# Altium PCB Power Supply.PcbDoc
Units mm, origin at the board's own origin, x right, y up, seen from the top; angles counter-clockwise.
Board outline 75 x 40 mm, 2 copper layers (Top Layer, Bottom Layer), stack 1.671 mm thick; 30 components, 19 nets, 79 pads, 7 vias.
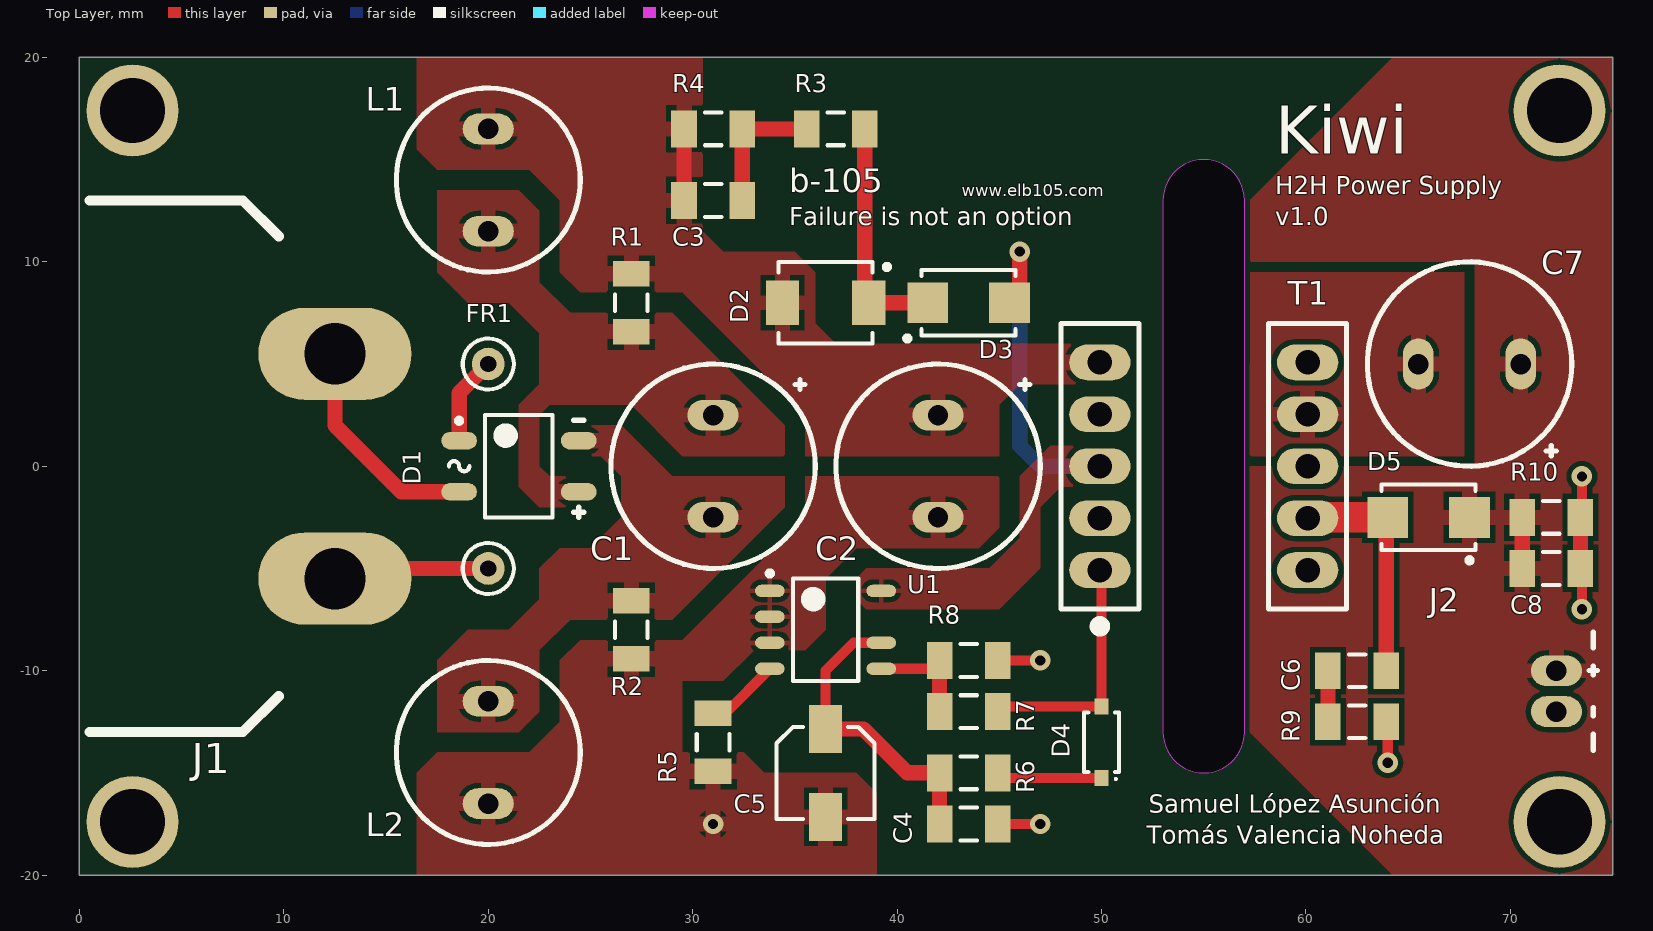
[diagram p0: Top Layer view]
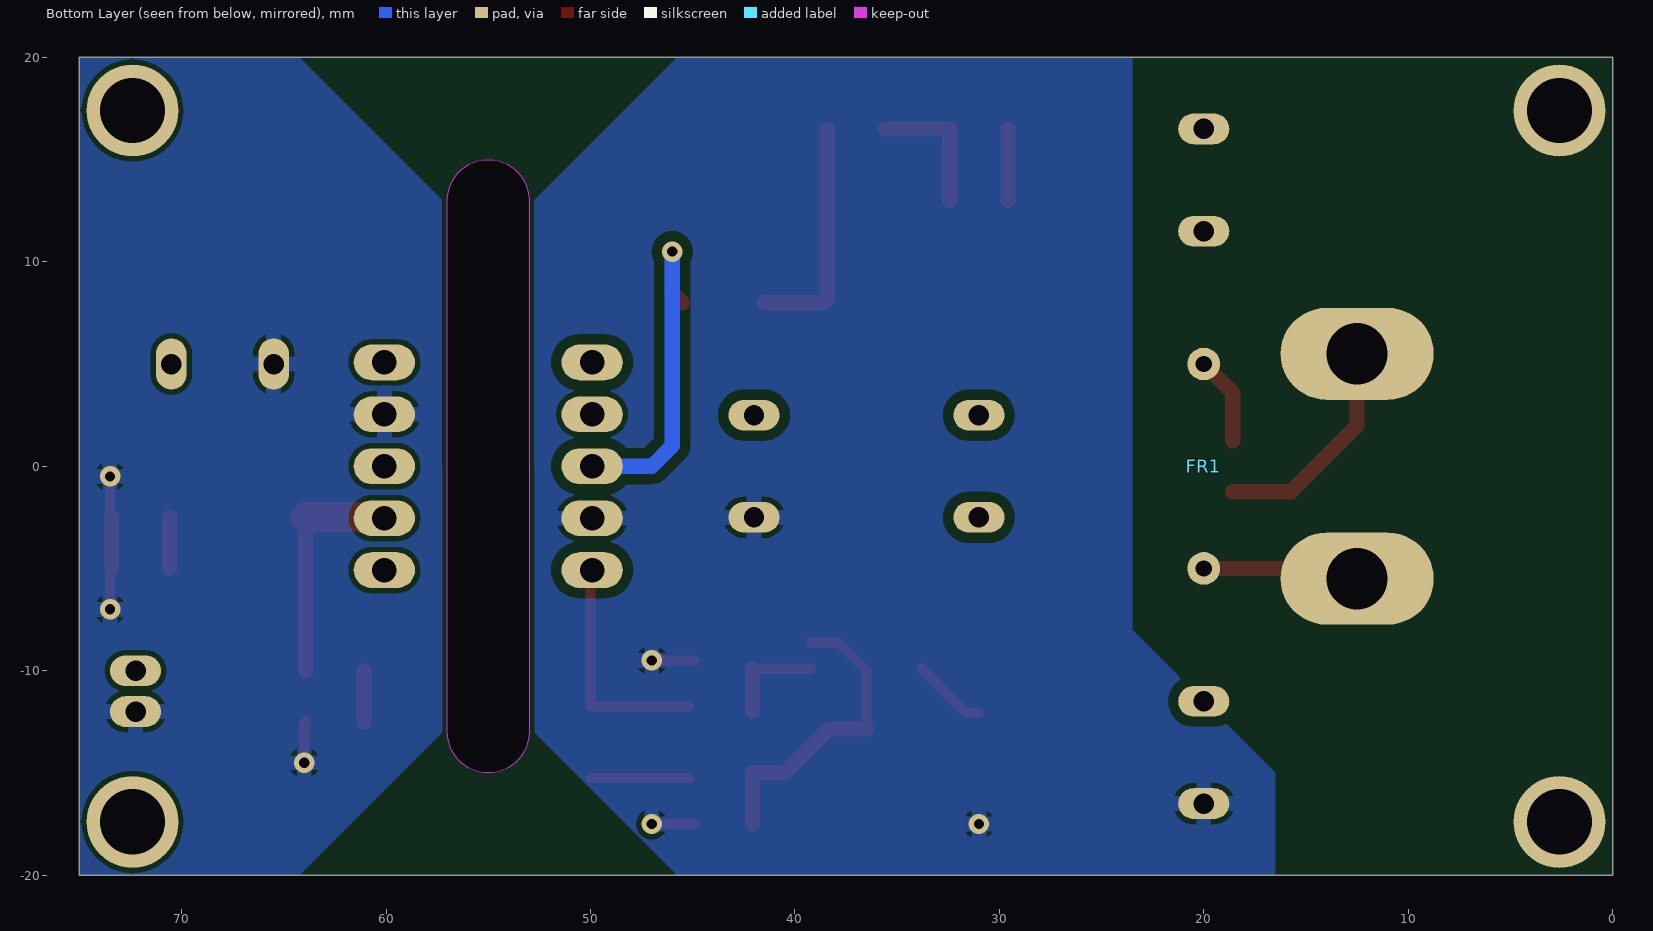
[diagram p1: Bottom Layer view, seen from below]

## Layer stack, top to bottom
Top Solder: solder mask 0.0102, Solder Resist, Dk 3.5
Top Layer: signal copper 0.0356
Dielectric 1: dielectric 1.6, FR-4, Dk 4.8
Bottom Layer: signal copper 0.0356
Bottom Solder: solder mask 0.0102, Solder Resist, Dk 3.5

## Board outline
0,-20 0,20 75,20 75,-20
cut-out: 53,-13 ccw(c55,-13) 55,-15 ccw(c55,-13) 57,-13 57,13 ccw(c55,13) 55,15 ccw(c55,13) 53,13

## Design rules (kind name [scope] priority, off if disabled: settings)
Clearance ClearancePriSide [InNetClass('Primary Side') vs InNetClass('Primary Side')] p1: gap=0.5
Clearance ClearancePolygonPriSide [InPolygon vs InNetClass('Primary Side')] p2: gap=0.5
Clearance [All] p3: gap=0.25
HoleSize [All] p1: absolutevalues=TRUE maxlimit=6.3 minlimit=0.3 maxpercent=80.000 minpercent=20.000
PolygonConnect PolygonConnectPriSideIC1 [(InComponent('U1') AND InNetClass('Primary Side'))] p1: connectstyle=Relief reliefconductorwidth=0.25 reliefentries=4 polygonreliefangle="90 Angle" airgapwidth=0.25
PolygonConnect [All] p2: connectstyle=Relief reliefconductorwidth=0.75 reliefentries=4 polygonreliefangle="90 Angle" airgapwidth=0.25
RoutingVias [All] p1: holewidth=0.5 width=0.8 viastyle="Through Hole" minholewidth=0.3 minwidth=0.6 maxholewidth=6.3 maxwidth=8
SilkToSolderMaskClearance [IsPad] p1: minsilkscreentomaskgap=0.15 clearancetoexposedcopper=TRUE
SolderMaskExpansion [All] p1: expansion=0.102
Width [All] p1: maxlimit=2.5 minlimit=0.25 preferedwidth=0.5
28 further rules are at their usual default settings.

## Classes and differential pairs
net class "Primary Side": AC_1 AC_2 AUX_OUT HVGND NetD1_1 NetD4_2 NetR5_1 NetT1_4 PRI_ALIM PRI_DRAIN RECT_+ RECT_- SNUBB_CAT SNUBB_DIV VDD VS

## Components (designator, comment, footprint, x,y, rotation, side; value= is the part's Value field where it differs from the comment)
C1 "6.8u" 450BXC6R8MEFC10X16 31,0 r270 top
C2 "6.8u" 450BXC6R8MEFC10X16 42,0 r270 top
C3 "100p" C1206 31,13 r0 top
C4 "0.1u" C1206 43.5,-17.5 r0 top
C5 "4.7u" EXV475M035A9BAA 36.5,-15 r270 top
C6 "2.2n" C1206 62.5,-10 r180 top
C7 "1200u" EEUFM1A122 68,5 r180 top
C8 "0.1u" C1206 72,-5 r0 top
D1 "MB6S-E3/45" MB6S-E3/45 21.5,0 r0 top
D2 "SM6T150A" SM6T150A 36.5,8 r0 top
D3 "MRA4005T3G" MRA4005T3G 43.5,8 r180 top
D4 "1N4148W-7-F" 1N4148W-7-F 50,-13.5 r270 top
D5 "B340LA-13-F" B340LA-13-F 66,-2.5 r0 top
FR1 "4.7" NFR25H0004708JA500 20,0 r90 bottom
J1 "JR-201S" JR-201S -6,0 r90 top
J2 "JST PH 2 Pin" S2B-PH-K-S 66,-11 r270 top
L1 "1m" DR0810-105L 20,14 r90 top
L2 "1m" DR0810-105L 20,-14 r270 top
R1 "6.8k" R1206 27,8 r90 top
R2 "6.8k" R1206 27,-8 r270 top
R3 "2k" R1206 37,16.5 r0 top
R4 "100k" R1206 31,16.5 r0 top
R5 "2k" R1206 31,-13.5 r270 top
R6 "33" R1206 43.5,-15 r180 top
R7 "100k" R1206 43.5,-12 r180 top
R8 "31.6k" R1206 43.5,-9.5 r0 top
R9 "180" R1206 62.5,-12.5 r0 top
R10 "15k" R1206 72,-2.5 r0 top
T1 "WE7508110151" WE7508110151 55,0 r0 top
U1 "UCC28910" UCC28910 36.5,-8 r0 top

## Footprints (in the part's own frame and the unit in brackets; to place one, negate y for a bottom-side part, rotate by r counter-clockwise, add the part's x,y. Pads: shape width x height; smd on the part's side, far side on the other; paste and mask are expansions set on the pad)
1N4148W-7-F [mm] "Diode - Standard, Switch, 1.25V, 300mA, 100V"
  rect 0.8x0.7 smd: 1(-1.75,0) 2(1.75,0)
  silkscreen extent -1.45,-0.85 1.85,0.85, body extent -1.42,-0.85 1.43,0.85, height 1.45
450BXC6R8MEFC10X16 [mm] "Capacitor - Electrolytic Capacitor, 6.8 uF, 450 V, 20%, 10 mm"
  oval 1.5x2.5 hole 1: 1(-2.5,0) 2(2.5,0)
  silkscreen extent -5,-5 5,5, body extent -4.99,-5 5,5, height 17
B340LA-13-F [mm] "Diode - Schottky, 450mV, 3A, 40V"
  rect 2x2 smd: 1(-2,0) 2(2,0)
  silkscreen extent -2.3,-2.22 2.3,1.6, body extent -2.29,-1.46 2.28,1.46, height 2.2
C1206 [mm] "Chip Capacitor, 2-Leads, Body 3,20x1,60mm, IPC Medium Density"
  rect 1.25x1.8 smd: 1(-1.425,0) 2(1.425,0)
  silkscreen extent -0.4,-0.8 0.4,0.8, body extent -1.7,-0.9 1.7,0.9, height 0.7
DR0810-105L [mm] "Inductor - Power, 1 mH, 0.5 A Sat. Current, 10%"
  oval 1.5x2.5 hole 1: 1(-2.5,0) 2(2.5,0)
  silkscreen extent -4.5,-4.5 4.5,4.5, body extent -5.21,-5.24 5.25,5.24, height 12
EEUFM1A122 [mm] "Capacitor - Electrolytic Capacitor, 1200 uF, 10 V, 20%, 10 mm"
  oval 1.5x2.5 hole 1: 1(-2.5,0) 2(2.5,0)
  silkscreen extent -5,-5 5,5, body extent -4.99,-5 5,5, height 21
EXV475M035A9BAA [mm] "Capacitor - Electrolytic Capacitor, SMD, 4.7 uF, 35 V, 4 mm"
  rect 2.35x1.6 smd: 1(-2.15,0) 2(2.15,0)
  silkscreen extent -2.25,-2.4 2.25,2.4, body extent -2.25,-2.4 2.25,2.4, height 5.4
JR-201S [mm] "Conn - 250 V AC, Inlet, IEC, Plug"
  oval 4.5x7.5 hole 3: 1(-5.5,-18.5) 2(5.5,-18.5)
  silkscreen extent -13,-15.75 13,-6.5, body extent -14,-21 14,0, height 16
MB6S-E3/45 [mm] "Diode - Bridge Rectifier, 600 V, 0.5 A"
  oval 1.75x0.85 smd: 1(-2.925,1.25) 2(-2.925,-1.25) 3(2.925,-1.25) 4(2.925,1.25)
  silkscreen extent -3.42,-2.5 3.17,2.5, body extent -2.05,-2.5 2.05,2.5, height 2.9
MRA4005T3G [mm] "Diode - Standard, 1.1V, 1A, 600V"
  rect 2x2 smd: 1(-2,0) 2(2,0)
  silkscreen extent -2.3,-1.6 3.12,1.87, body extent -2.29,-1.46 2.28,1.46, height 2.2
NFR25H0004708JA500 [mm] "Resistor - Fusible, Non-flammable Resistor"
  round 1.6 hole 0.8: 1(-5,0) 2(5,0)
  body extent -5.25,-1.25 5.25,1.25, height 2.5
R1206 [mm] "Chip Resistor, 2-Leads, Body 3,20x1,60mm, IPC Medium Density"
  rect 1.25x1.8 smd: 1(-1.425,0) 2(1.425,0)
  silkscreen extent -0.4,-0.8 0.4,0.8, body extent -1.7,-0.9 1.7,0.9, height 0.7
S2B-PH-K-S [mm] "Conn - Battery, Male, 2 Pin, PCB, Right Angle"
  oval 1.5x2.5 hole 1: 1(-1,6.25) 2(1,6.25)
  silkscreen extent -2.9,7.85 2.9,8.25, body extent -3,0 3,8, height 4.8
SM6T150A [mm] "TVS - Unidirectional, 150V, 600W"
  rect 1.62x2.18 smd: 1(-2.11,0) 2(2.11,0)
  silkscreen extent -2.3,-2 3.13,2, body extent -2.3,-1.97 2.3,1.97, height 2.5
UCC28910 [mm] "IC - SMPS Flyback, 700V Flyback Switcher with Constant-Voltage/Constant-Current and Primary-Side Control"
  oval 1.45x0.6 smd: 1(-2.725,1.905) 2(-2.725,0.635) 3(-2.725,-0.635) 4(-2.725,-1.905) 5(2.725,-1.905) 6(2.725,-0.635) 8(2.725,1.905)
  silkscreen extent -2.85,-2.5 1.6,2.88, body extent -2,-2.5 2,2.5, height 1.75
WE7508110151 [mm] "Transformer - Flyback/Offline Transformer"
  oval 3x1.75 hole 1.2: 1(-5.08,-5.08) 2(-5.08,-2.54) 3(-5.08,0) 4(-5.08,2.54) 5(-5.08,5.08) 6(5.08,5.08) 7(5.08,2.54) 8(5.08,0) 9(5.08,-2.54) 10(5.08,-5.08)
  silkscreen extent -6.98,-8.08 6.98,6.98, body extent -6.98,-6.98 6.98,6.98, height 12.7

## Part data
C1 C2: library part 450BXC6R8MEFC10X16, "Capacitor - Electrolytic Capacitor, 6.8 uF, 450 V, 20%, 10 mm"
C3 C4 C6 C8: library part Capacitor, "Capacitor"
C5: library part EXV475M035A9BAA, "Capacitor - Electrolytic Capacitor, SMD, 4.7 uF, 35 V, 4 mm"
C7: library part EEUFM1A122, "Capacitor - Electrolytic Capacitor, 1200 uF, 10 V, 20%, 10 mm"
D1: "Diode - Bridge Rectifier, 600 V, 0.5 A"
D2: "TVS - Unidirectional, 150V, 600W"
D3: "Diode - Standard, 1.1V, 1A, 600V"
D4: "Diode - Standard, Switch, 1.25V, 300mA, 100V"
D5: "Diode - Schottky, 450mV, 3A, 40V"
FR1: library part NFR25H0004708JA500, "Resistor - Fusible, Non-flammable Resistor"
J1: "Conn - 250 V AC, Inlet, IEC, Plug"
J2: library part S2B-PH-K-S, "Conn - Battery, Male, 2 Pin, PCB, Right Angle"
L1 L2: library part DR0810-105L, "Inductor - Power, 1 mH, 0.5 A Sat. Current, 10%"
R1 R2 R3 R4 R5 R6 R7 R8 R9 R10: library part Resistor, "Resistor"
T1: "Transformer - Flyback/Offline Transformer"
U1: "IC - SMPS Flyback, 700V Flyback Switcher with Constant-Voltage/Constant-Current and Primary-Side Control"

## Free pads (board coordinates)
  round 4.5 hole 3.2: ""(2.6,-17.4) ""(2.6,17.4) ""(72.4,-17.4) ""(72.4,17.4)

## Via types
v1: diameter 1, hole 0.5, Top Layer to Bottom Layer, 7 vias

## Nets (pads, with @x,y where several pads share a name; then routed paths per layer and width w, separated by ;. In a path a pad name is that pad's centre, name@x,y a point inside that pad or via, vN(x,y) a via of type N, cw(c..) or ccw(c..) an arc to the next point about the centre after c; other vN are vias at no path point)
5V: C7.1 C8.1 D5.2 J2.1 R10.1 | length 2.5
  Top Layer w0.75: C8.1 R10.1
AC_1: FR1.1 J1.1 | length 7.7
  Top Layer w0.75: J1.1 13,-5 FR1.1
AC_2: D1.2 J1.2 | length 10.9
  Top Layer w0.75: J1.2 12.5,2 15.75,-1.25 D1.2
AUX_OUT: D4.1 R7.1 T1.1 | length 11.4
  Top Layer w0.5: R7.1@45.175,-11.75 D4.1 T1.1@50,-5.16
GND: C7.2 C8.2 J2.2 R9.2 R10.2 T1.7 | length 8.6
  Top Layer w0.5: R9.2 64,-12.575 v1(64,-14.5) ; C8.2 73.5,-5.075 v1(73.5,-7) ; R10.2 73.5,-2.5 v1(73.5,-0.5)
  Top Layer w0.75: C8.2 R10.2
HVGND: C2.2 C4.2 C5.2 L2.2 R2.2 R5.2 R8.2 T1.2 U1.1 U1.2 U1.3 | length 4.2
  Top Layer w0.5: C4.2 v1(47,-17.5) ; R8.2 v1(47,-9.5)
  other v1: 31,-17.5
NetD1_1: D1.1 FR1.2 | length 4.3
  Top Layer w0.75: D1.1 18.575,3.575 FR1.2
NetD4_2: D4.2 R6.1 | length 4.8
  Top Layer w0.5: R6.1@45.175,-15.25 D4.2
NetR5_1: R5.1 U1.4 | length 3.7
  Top Layer w0.5: R5.1 31.605,-12.075 U1.4
PRI_ALIM: C2.1 C3.1 D2.1 L1.2 R1.2 R4.1 T1.5 | length 3.5
  Top Layer w0.75: C3.1 R4.1
PRI_DRAIN: D3.1 T1.3 U1.8 | length 16.5
  Top Layer w0.75: D3.1 46,8.5 v1(46,10.5)
  Bottom Layer w0.75: v1(46,10.5) 46,1 47,0 T1.3
RECT_+: C1.1 D1.3 L1.1 R1.1
RECT_-: C1.2 D1.4 L2.1 R2.1
SEC_FILTER: C6.2 R9.1 | length 2.5
  Top Layer w0.75: R9.1 C6.2
SEC_OUT: C6.1 D5.1 T1.9 | length 11.4
  Top Layer w0.75: C6.1 D5.1@63.925,-2.5
  Top Layer w1.5: T1.9 60.08,-2.5 D5.1@63.925,-2.5
SNUBB_CAT: D2.2 D3.2 R3.2 | length 11.5
  Top Layer w0.75: R3.2 38.425,8.185 D2.2 D3.2
SNUBB_DIV: C3.2 R3.1 R4.2 | length 6.7
  Top Layer w0.75: C3.2 R4.2 R3.1
VDD: C4.1 C5.1 R6.2 U1.6 | length 15.1
  Top Layer w0.5: C5.1 36.5,-10 37.865,-8.635 U1.6
  Top Layer w0.75: C5.1 38.35,-12.85 40.5,-15 R6.2 C4.1
VS: R7.2 R8.1 U1.5 | length 4.5
  Top Layer w0.5: U1.5 R8.1@41.67,-9.905
  Top Layer w0.75: R7.2 R8.1@42.075,-9.905
pads on no net: T1.4 T1.6 T1.8 T1.10

## Polygon pours and split planes (outlines as drawn)
GND on Bottom Layer "GND_BOT" (solid, pour order 2): 75,-20 64.25,-20 57.25,-13 57.25,13 64.25,20 75,20
HVGND on Bottom Layer "HVGND_BOT" (solid, pour order 8): 52.75,-13 52.75,13 45.75,20 23.5,20 23.5,-8 16.5,-15 16.5,-20 45.75,-20
5V on Top Layer "5V_TOP" (solid, pour order 4): 64.25,-20 75,-20 75,20 64.25,20 57.25,13 57.25,10 68.25,10 68.25,0 57.25,0 57.25,-13
GND on Top Layer "GND_TOP" (solid, pour order 6): 57.25,0.5 67.75,0.5 67.75,1.25 67.75,9.5 57.25,9.5
RECT_+ on Top Layer "RECT_+_TOP" (solid, pour order 10): 25.5,-2 25.5,-0.5 23,-0.5 22.5,0 22.5,2.5 23,3 27,3 29.5,0.5 34.5,0.5 34.5,2 32.5,4 29,7.5 25.5,7.5 24,7.5 22.5,9 22.5,12.5 21.5,13.5 17.5,13.5 17.5,9.5 19,8 21,8 22.5,6.5 22.5,4 21.5,3 21.5,-1 22.5,-2
RECT_- on Top Layer "RECT_-_TOP" (solid, pour order 12): 23.5,0.5 23.5,2 26.5,2 27.5,1 29,-0.5 34.5,-0.5 34.5,-2 29,-7.5 25.5,-7.5 24,-7.5 22.5,-9 22.5,-12 21.5,-13 17.5,-13 17.5,-9.5 19,-8 21,-8 22.5,-6.5 22.5,-5 23.5,-4 25,-4 26.5,-2.5 26.5,-2 26.5,-0.5 25.5,0.5
PRI_ALIM on Top Layer "PRI_ALIM_TOP" (solid, pour order 14): 16.5,15.5 16.5,20 30.5,20 30.5,13.5 30.5,11.5 31.5,10.5 35,10.5 36,9.5 36,7 37,6 41,6 51.5,6 51.5,4 46,4 45,3 45,0.5 35.5,0.5 35.5,2.5 35,3 29.5,8.5 24.5,8.5 23.5,9.5 23.5,13 22,14.5 17.5,14.5
HVGND on Top Layer "HVGND_BTOP" (solid, pour order 16): 16.5,-15 16.5,-20 39,-20 39,-16 38,-15 33.5,-15 32.5,-14 29.5,-14 29.5,-10.5 31.5,-10.5 33,-9 35.5,-9 36.5,-8 36.5,-5.5 38,-4 44,-4 45,-3 45,-0.5 35.5,-0.5 35.5,-2.5 35,-3 33,-5 29.5,-8.5 24.5,-8.5 23.5,-9.5 23.5,-12.5 22,-14 17.5,-14
PRI_DRAIN on Top Layer "PRI_DRAIN_TOP" (solid, pour order 18): 38.5,-7 45,-7 47,-5 47,-2 48,-1 51.5,-1 51.5,1 47.5,1 46,-0.5 46,-3.5 44.5,-5 38.5,-5 38,-5.5 38,-6.5

## Silkscreen, mask and mechanical layers (free items; w line width, h text height)
Top Overlay:
  circle w0.2: c20,5 r1.25
  circle w0.2: c20,-5 r1.25
  text "Kiwi" at 58.5,14.5 h4
  text "b-105" at 34.716,13 h2
  text "www.elb105.com" at 43.155,13 h1
  text "H2H Power Supply" at 58.5,13 h1.5
  text "Failure is not an option" at 34.715,11.5 h1.5
  text "v1.0" at 58.5,11.5 h1.5
  text "Samuel López Asunción" at 52.318,-17.25 h1.5
  text "Tomás Valencia Noheda" at 52.21,-18.75 h1.5
Mechanical 1:
  lines w0.25: 0,-20 75,-20 75,20 0,20 0,-20 ; 53,-13 ccw(c55,-13) 57,-13 57,0 57,13 ccw(c55,13) 53,13 53,0 53,-13